# Altium PCB CW308T_SPC56.PcbDoc (part 1 of 2)
Units mil, origin at the board's own origin, x right, y up, seen from the top; angles counter-clockwise.
Board outline 2060 x 3180 mil, 2 copper layers (Component Side, Solder Side), stack 62.8 mil thick; 83 components, 64 nets, 689 pads, 120 vias.
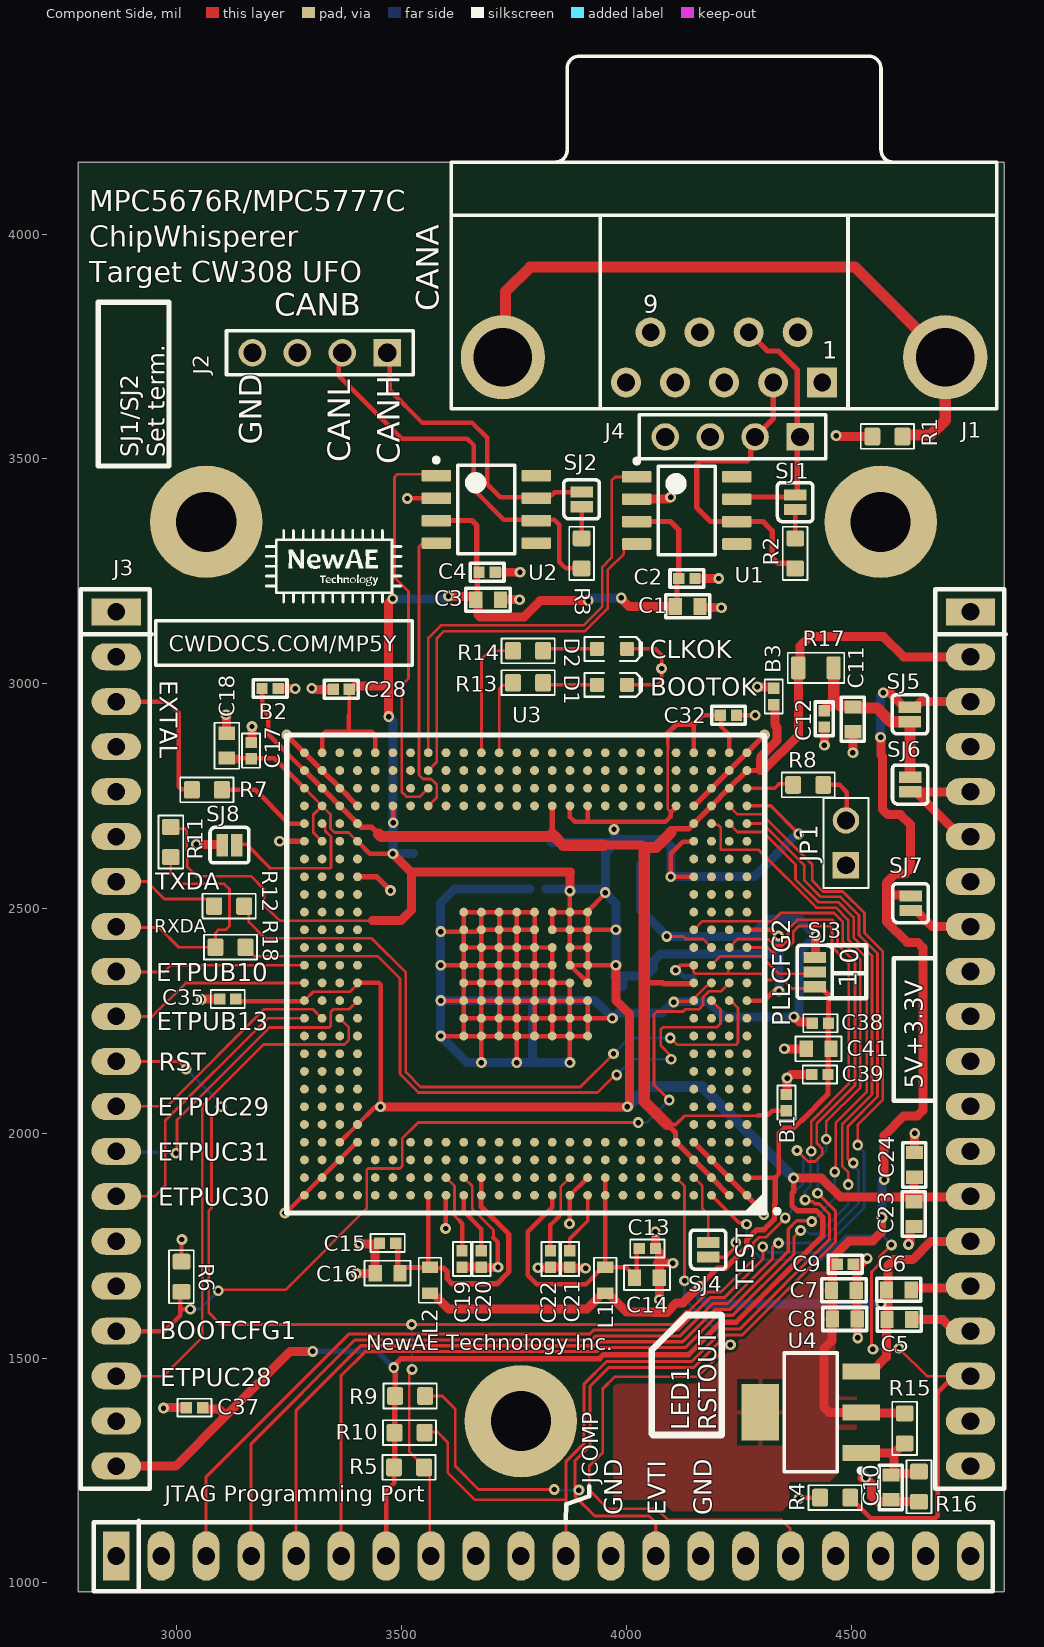
[diagram p0: Component Side view]
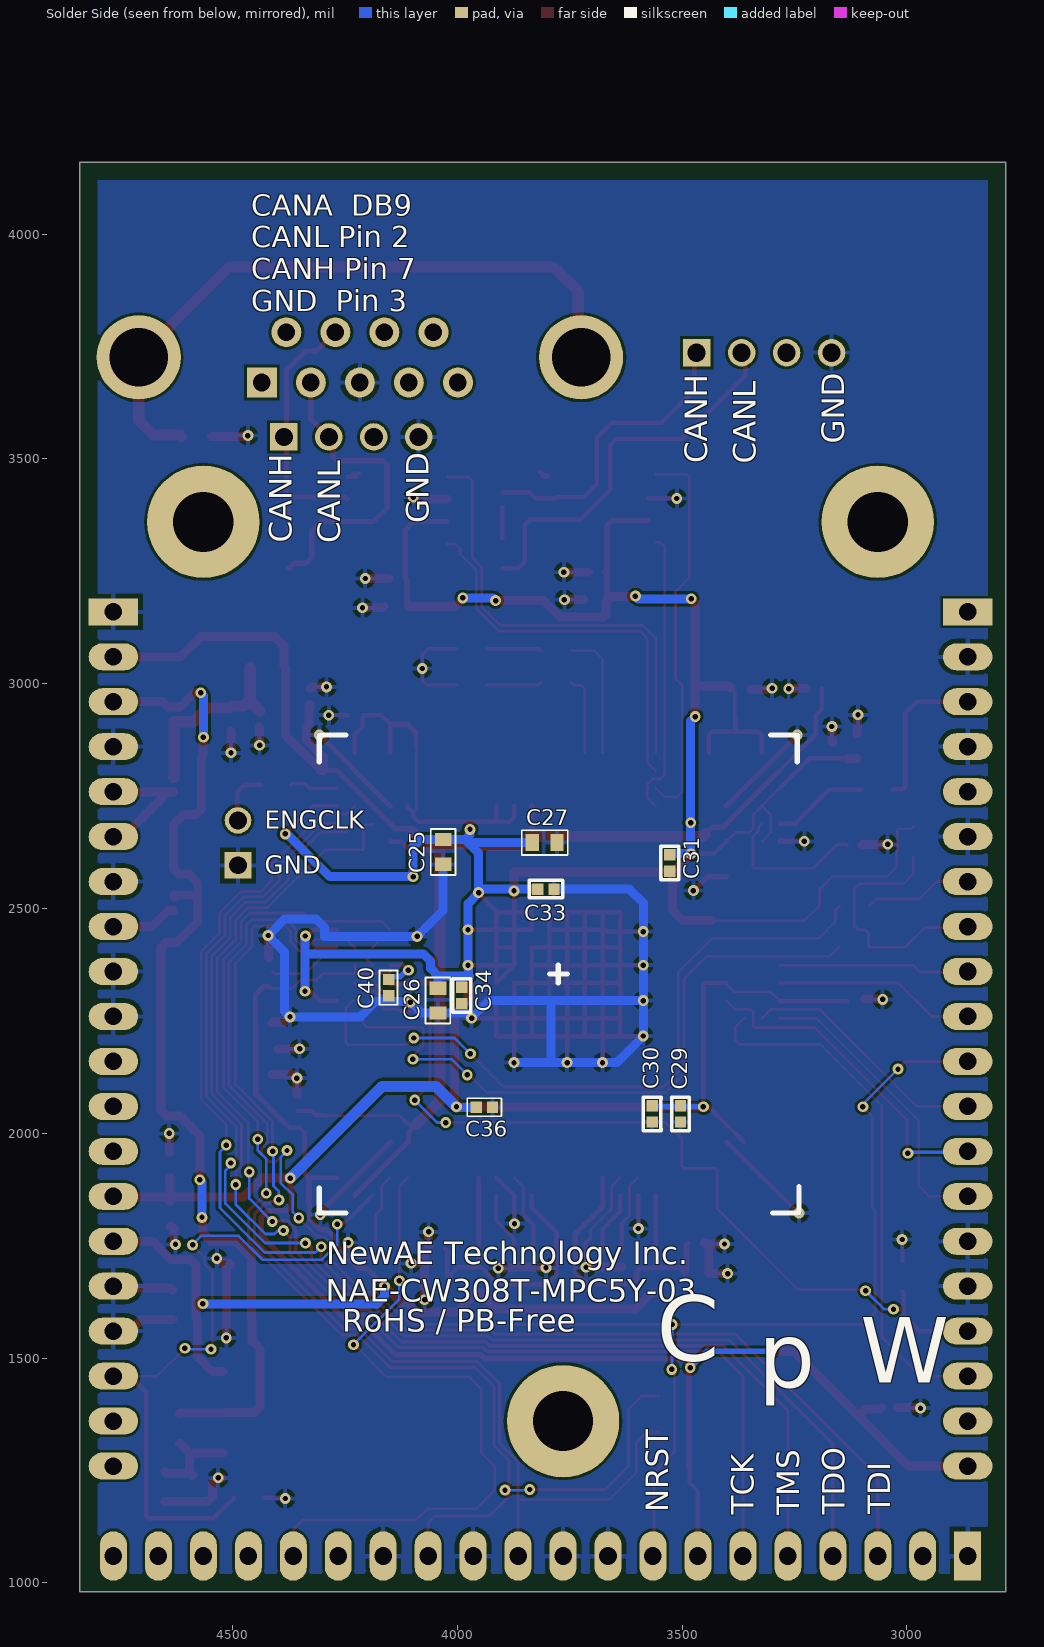
[diagram p1: Solder Side view, seen from below]

## Layer stack, top to bottom
Top Solder: solder mask 0.4, Solder Resist, Dk 3.5
Component Side: signal copper 1.4
Dielectric 3: prepreg 60, Dk 4.2
Solder Side: signal copper 1.4
Bottom Solder: solder mask 0.4, Solder Resist, Dk 3.5

## Board outline
2780,980 4840,980 4840,4160 2780,4160

## Design rules (kind name [scope] priority, off if disabled: settings)
BoardOutlineClearance [All] p1: gap=10 ignorepadtopadclearanceinfootprint=FALSE except(0: Arc-SplitContinuation Track-SplitContinuation SMDPad-SplitContinuation THPad-SplitContinuation Via-SplitContinuation Fill-SplitContinuation Poly-SplitContinuation Region-SplitContinuation Text-SplitContinuation; 40: Poly-OutlineEdge Poly-CavityEdge Poly-CutoutEdge Poly-SplitBarrior)
Clearance [All] p1: gap=6 ignorepadtopadclearanceinfootprint=FALSE except(0: Arc-Hole Track-Hole SMDPad-Hole THPad-Hole Via-Hole Fill-Hole Poly-Hole Region-Hole Text-Hole)
PlaneConnect PlaneConnect_Via [isVia] p1: planeconnectstyle=Direct reliefexpansion=20 reliefentries=4 reliefconductorwidth=10 reliefairgap=10
PlaneConnect [All] p2: planeconnectstyle=Relief reliefexpansion=20 reliefentries=4 reliefconductorwidth=10 reliefairgap=10
PolygonConnect [All] p1: connectstyle=Relief reliefconductorwidth=10 reliefentries=4 polygonreliefangle="90 Angle" airgapwidth=10
RoutingVias [All] p1: holewidth=12 width=24 viastyle="Through Hole" minholewidth=12 minwidth=20 maxholewidth=28 maxwidth=50
SilkToSilkClearance [All] p1: silktosilkclearance=1
SilkToSolderMaskClearance [IsPad] p1: minsilkscreentomaskgap=2 clearancetoexposedcopper=TRUE
SolderMaskExpansion [All] p1: expansion=4
Width [All] p1: maxlimit=50 minlimit=6 preferedwidth=8 minimp=50.000000 maximp=50.000000 favimp=50.000000
27 further rules are at their usual default settings.

## Classes and differential pairs
component class mpc56_clk: JP1 R4 R5 R6 R7 R8 R9 R10 SJ3 SJ4
component class mpc56_can: C1 C2 C3 C4 J1 J2 J4 R1 R2 R3 SJ1 SJ2 U1 U2
component class mpc56_cwconn: C5 C6 C7 C8 C9 C10 C11 C12 J3 R11 R12 R15 R16 R17 R18 SJ5 SJ6 SJ7 U4
component class mpc56_mcupower: B1 B2 B3 C13 C14 C15 C16 C17 C18 C19 C20 C21 C22 C23 C24 C25 C26 C27 C28 C29 C30 C31 C32 C33 C34 C35 C36 C37 C38 C39 C40 C41 L1 L2 SJ8
component class mpc56_cpuio2: D1 D2 R13 R14 U3

## Components (designator, comment, footprint, x,y, rotation, side; value= is the part's Value field where it differs from the comment)
B1 "DNM" CAPC0402_M#1 4355.5,2068.35 r90 top
B2 "DNM" CAPC0402_M#2 3207.35,2989.5 r0 top
B3 "DNM" CAPC0402_M#1 4327.3,2971.54 r90 top
C1 "2u2" CAPC0603_M 4136,3172 r0 top
C2 "100n" CAPC0402_M#2 4134,3234 r0 top
C3 "2u2" CAPC0603_M 3692,3187 r0 top
C4 "100n" CAPC0402_M#2 3690,3248 r0 top
C5 "2u2" CAPC0603_M 4606.59,1585.85 r0 top
C6 "2u2" CAPC0603_M 4605.59,1651.85 r0 top
C7 "2u2" CAPC0603_M 4483.41,1650.78 r0 top
C8 "2u2" CAPC0603_M 4485.41,1587.15 r0 top
C9 "100n" CAPC0402_M#2 4486.41,1709.15 r0 top
C10 "2u2" CAPC0603_M 4587.85,1212.41 r270 top
C11 "2u2" CAPC0603_M 4503.5,2920.94 r270 top
C12 "100n" CAPC0402_M#2 4439.57,2922.01 r270 top
C13 "100n" CAPC0402_M#1 4046.23,1743.92 r0 top
C14 "2u2" CAPC0603_M 4045.23,1678.99 r0 top
C15 "100n" CAPC0402_M#1 3468.5,1755.89 r180 top
C16 "2u2" CAPC0603_M 3468.5,1688.96 r180 top
C17 "100n" CAPC0402_M#1 3164.97,2851.39 r90 top
C18 "2u2" CAPC0603_M 3110.85,2862.2 r90 top
C19 "100n" CAPC0402_M#1 3633.86,1720.47 r270 top
C20 "100n" CAPC0402_M#1 3677.17,1720.47 r270 top
C21 "100n" CAPC0402_M#1 3874.02,1720.47 r270 top
C22 "100n" CAPC0402_M#1 3830.71,1720.47 r270 top
C23 "2u2" CAPC0603_M 4639.05,1820.64 r270 top
C24 "2u2" CAPC0603_M 4640.15,1929.85 r90 top
C25 "2u2" CAPC0603_M 4031.5,2625.98 r270 bottom
C26 "2u2" CAPC0603_M 4043.31,2295.28 r270 bottom
C27 "2u2" CAPC0603_M 3805.83,2646.66 r180 bottom
C28 "100n" CAPC0402_M#2 3365.4,2987.62 r180 top
C29 "100n" CAPC0402_M#2 3503.93,2043.3 r270 bottom
C30 "100n" CAPC0402_M#2 3566.92,2043.31 r270 bottom
C31 "100n" CAPC0402_M#2 3527.55,2601.38 r270 bottom
C32 "100n" CAPC0402_M#2 4226.53,2929.94 r0 top
C33 "100n" CAPC0402_M#2 3803.14,2543.31 r180 bottom
C34 "100n" CAPC0402_M#2 3990.31,2306.9 r270 bottom
C35 "100n" CAPC0402_M#1 3113,2299 r180 top
C36 "100n" CAPC0402_M#1 3940,2058 r180 bottom
C37 "100n" CAPC0402_M#1 3039,1390 r180 top
C38 "100n" CAPC0402_M#1 4431,2245 r180 top
C39 "100n" CAPC0402_M#1 4430,2131 r180 top
C40 "100n" CAPC0402_M#1 4153,2324 r270 bottom
C41 "2u2" CAPC0603_M 4427,2188 r180 top
D1 "LED, 0603, Green" LED-0603-GREEN 3967.62,2997.57 r0 top
D2 "LED, 0603, Red" LED-0603-RED 3967.62,3077.42 r0 top
J1 "DRB-09P11G1R" TAIT-DRB-09P11G1R_V 4380.47,3781.81 r0 top
J2 "HMTSW-104-23-L-S-237" SMTC-HMTSW-104-23-X-S-237 3467.72,3736.22 r180 top
J3 "CW308_TARGETCON" CW308_TBOARD_CONN 2865,3160 r0 top locked
J4 "HMTSW-104-23-L-S-237" SMTC-HMTSW-104-23-X-S-237 4386,3549 r180 top
JP1 "Jumper" 2x2.54mm_Header 4488,2596 r90 top
L1 "1k @ 1Mhz" IND_0603 3952.74,1673.24 r270 top
L2 "1k @ 1Mhz" IND_0603 3562.98,1673.24 r270 top
R1 "10R" RESC1608X55N 4580,3550 r0 top
R2 "120R" RESC1608X55N 4375,3290 r270 top
R3 "120R" RESC1608X55N 3900,3290 r270 top
R4 "10k" RESC1608X55N 4464,1190 r0 top
R5 "10k" RESC1608X55N 3516.27,1257 r0 top
R6 "10k" RESC1608X55N 3010.06,1681.17 r90 top
R7 "22R" RESC1608X55N 3066.65,2764.13 r180 top
R8 "22R" RESC1608X55N 4404,2775 r0 top
R9 "10k" RESC1608X55N 3518.7,1415.88 r180 top
R10 "10k" RESC1608X55N 3517.3,1334.4 r0 top
R11 "10k" RESC1608X55N 2986.35,2647.92 r90 top
R12 "10k" RESC1608X55N 3116.08,2505.41 r180 top
R13 "1k" RESC1608X55N 3781.04,3002.32 r0 top
R14 "1k" RESC1608X55N 3781.04,3073.26 r0 top
R15 "470R" RESC1608X55N 4618.59,1343.85 r270 top
R16 "22R" RESC1608X55N 4650.41,1214.15 r270 top
R17 "1R0" RESC2012X70N 4421.26,3035.43 r0 top
R18 "10k" RESC1608X55N 3119,2414 r180 top
SJ1 "NC" SJ_2S_NC 4375,3403.78 r90 top
SJ2 "NC" SJ_2S_NC 3900,3410 r90 top
SJ3 "NC" SJ_3S_NC12 4418.5,2358.68 r270 top
SJ4 "NC" SJ_2S_NC 4181.46,1741.1 r90 top
SJ5 "NC" SJ_2S_NC 4630.31,2931.77 r90 top
SJ6 "NO" SJ_2S_NO 4630.85,2775.75 r90 top
SJ7 "NO" SJ_2S_NO 4631.63,2511.75 r90 top
SJ8 "NC" SJ_2S_NC 3116.86,2641.12 r0 top
U1 "CAN8SOIC_BASIC" SOIC8_NARROW 4133.86,3385.83 r0 top
U2 "CAN8SOIC_BASIC" SOIC8_NARROW 3688,3388 r0 top
U3 "SPC5676RDK2MVU1R" TEPBGA416_27x27 3775.59,2354.33 r180 top locked
U4 "LD1117STR" SOT-223_L 4409.6,1379.64 r180 top

## Footprints (in the part's own frame and the unit in brackets; to place one, negate y for a bottom-side part, rotate by r counter-clockwise, add the part's x,y. Pads: shape width x height; smd on the part's side, far side on the other; paste and mask are expansions set on the pad)
2x2.54mm_Header [mm]
  rect 1.5x1.5 hole 1: 1(0,0)
  round 1.5 hole 1: 2(2.54,0)
  silkscreen extent -1.27,-1.27 3.81,1.27, body extent -1.27,-1.27 3.81,1.27, height 9.5
CAPC0402_M#1 [mm] "Chip Capacitor, 2-Leads, Body 0402, IPC Medium Density"
  rect 0.64x0.64 smd mask+0.06: 1(-0.46,0) 2(0.46,0)
  silkscreen extent -0.97,-0.51 0.97,0.51, body extent -0.55,-0.3 0.55,0.3, height 0.6
CAPC0402_M#2 [mm] "Chip Capacitor, 2-Leads, Body 0402, IPC Medium Density"
  rect 0.64x0.64 smd: 1(-0.46,0) 2(0.46,0)
  silkscreen extent -0.95,-0.5 0.95,0.5, body extent -0.55,-0.3 0.55,0.3, height 0.6
CAPC0603_M [mm]
  rect 0.75x0.95 smd: 1(-0.7,0) 2(0.7,0)
  silkscreen extent -1.25,-0.65 1.25,0.65, body extent -0.85,-0.45 0.85,0.45, height 0.9
CW308_TBOARD_CONN [mil]
  rect 110x60 hole 39: A1(0,0) C1(1900,0)
  oval 110x60 hole 39: A2(0,-100) A3(0,-200) A4(0,-300) A5(0,-400) A6(0,-500) A7(0,-600) A8(0,-700) A9(0,-800) A10(0,-900) A11(0,-1000) A12(0,-1100) A13(0,-1200) A14(0,-1300) A15(0,-1400) A16(0,-1500) A17(0,-1600) A18(0,-1700) A19(0,-1800) A20(0,-1900) C2(1900,-100) C3(1900,-200) C4(1900,-300) C5(1900,-400) C6(1900,-500) C7(1900,-600) C8(1900,-700) C9(1900,-800) C10(1900,-900) C11(1900,-1000) C12(1900,-1100) C13(1900,-1200) C14(1900,-1300) C15(1900,-1400) C16(1900,-1500) C17(1900,-1600) C18(1900,-1700) C19(1900,-1800) C20(1900,-1900)
  rect 60x110 hole 39: B1(0,-2100)
  oval 60x110 hole 39: B2(100,-2100) B3(200,-2100) B4(300,-2100) B5(400,-2100) B6(500,-2100) B7(600,-2100) B8(700,-2100) B9(800,-2100) B10(900,-2100) B11(1000,-2100) B12(1100,-2100) B13(1200,-2100) B14(1300,-2100) B15(1400,-2100) B16(1500,-2100) B17(1600,-2100) B18(1700,-2100) B19(1800,-2100) B20(1900,-2100)
  round 250 hole 134: MH1(200,200) MH2(900,-1800) MH2(1700,200)
  silkscreen extent -79,-2179 1979,50, body extent -50,-2149 1950,50, height 48
IND_0603 [mm] "Chip Inductor, 2-Leads, Body 1.60x0.80mm, IPC Medium Density"
  rect 0.64x0.92 smd: 1(-0.73,0) 2(0.73,0)
  Component Side pour cut-out: -0.686,0.457 0.838,0.457 0.838,-0.457 -0.686,-0.457
  silkscreen extent -1.27,-0.64 1.27,0.64, body extent -0.82,-0.43 0.82,0.43, height 0.9
LED-0603-GREEN [mm]
  round 0.254 on Mech15: 0(0,0)
  rrect25% 0.8x0.8 smd: A(-0.85,0) K(0.85,0)
  Component Side pour cut-out: -0.5,0.5 0.5,0.5 0.5,-0.5 -0.5,-0.5
  silkscreen extent -1.55,-0.67 1.68,0.67, body extent -0.8,-0.4 0.8,0.4, height 0.75
LED-0603-RED [mm]
  round 0.254 on Mech15: 0(0,0)
  rrect25% 0.8x0.8 smd: A(-0.85,0) K(0.85,0)
  Component Side pour cut-out: -0.5,0.5 0.5,0.5 0.5,-0.5 -0.5,-0.5
  silkscreen extent -1.55,-0.67 1.68,0.67, body extent -0.8,-0.4 0.8,0.4, height 0.75
RESC1608X55N [mm] "Chip Resistor, Body 1.6x0.8mm, EIA 0603, IPC Medium Density"
  round 0.254 on Mech15: 0(0,0)
  rrect25% 0.9x1 smd: 1(-0.85,0) 2(0.85,0)
  Component Side pour cut-out: -0.6,0.5 -0.4,0.7 0.4,0.7 0.6,0.5 0.6,-0.5 0.4,-0.7 -0.4,-0.7 -0.6,-0.5
  silkscreen extent -1.5,-0.7 1.5,0.7, body extent -0.87,-0.47 0.88,0.48, height 0.54
RESC2012X70N [mm] "Chip Resistor, Body 2.0x1.2mm, EIA 0805, IPC Medium Density"
  round 0.254 on Mech15: 0(0,0)
  rrect25% 0.8x1.3 smd: 1(-1,0) 2(1,0)
  Component Side pour cut-out: -0.725,0.65 -0.525,0.85 0.525,0.85 0.725,0.65 0.725,-0.65 0.525,-0.85 -0.525,-0.85 -0.725,-0.65
  silkscreen extent -1.6,-0.85 1.6,0.85, body extent -1.1,-0.67 1.1,0.68, height 0.69
SJ_2S_NC [mil] "Solder Jumper, closed with solder paste"
  rect 25x50 smd: 1(-16.22,0) 2(16.22,0)
  silkscreen extent -43,-39 43,39
SJ_2S_NO [mil] "Solder Jumper, open (no paste)"
  rect 25x50 smd paste-393.7: 1(-16.22,0) 2(16.22,0)
  silkscreen extent -43,-39 43,39
SJ_3S_NC12 [mil] "3-Way Solder Jumper, pads 1-2 closed"
  rect 25x50 smd: 1(-32.43,0) 2(0,0)
  rect 25x50 smd paste-393.7: 3(32.44,0)
  silkscreen extent -60,-39 59,39
SMTC-HMTSW-104-23-X-S-237 [mm] "Terminal Strip, 1x2 Pins, Vertical, 2.54mm Pitch, Male"
  rect 1.55x1.55 hole 1.02: 1(0,0)
  round 1.55 hole 1.02: 2(2.54,0) 3(5.08,0) 4(7.62,0)
  silkscreen extent -1.46,-1.24 9.08,1.24, body extent -1.27,-1.27 8.89,1.27, height 8.56
SOIC8_NARROW [mm] "SOIC, 8-Leads, Body 5x4mm, Pitch 1.27mm, IPC Low Density"
  rrect15% 1.65x0.65 smd: 1(-2.825,1.905) 2(-2.825,0.635) 3(-2.825,-0.635) 4(-2.825,-1.905) 5(2.825,-1.905) 6(2.825,-0.635) 7(2.825,0.635) 8(2.825,1.905)
  silkscreen extent -2.95,-2.5 1.6,2.9, body extent -3,-2.45 3,2.45, height 1.63
SOT-223_L [mm] "SOT223, 4-Leads, Body 6.5x3.5mm, Pitch 2.3mm, Lead Span 7mm, IPC High Density"
  rect 2.1x0.9 smd: 1(-2.85,2.3) 2(-2.85,0) 3(-2.85,-2.3)
  rect 2.1x3.2 smd: 4(2.85,0)
  silkscreen extent -2.98,-3.35 1.5,3.42, body extent -1.85,-3.35 1.85,3.35, height 1.8
TAIT-DRB-09P11G1R_V [mm] "Connector, D-Sub R/A  Male Connector, 2.77 mm Pitch"
  rect 1.69x1.69 hole 0.991: 1(1.385,-2.84)
  round 1.69 hole 0.991: 2(-1.385,-2.84) 3(-4.155,-2.84) 4(-6.925,-2.84) 5(-9.695,-2.84) 6(0,0) 7(-2.77,0) 8(-5.54,0) 9(-8.31,0)
  round 4.76 hole 3.3: 10(-16.65,-1.42) 11(8.34,-1.42)
  silkscreen extent -19.56,-4.32 11.24,15.6, body extent -19.85,-4.33 11.47,16.38, height 12.66
TEPBGA416_27x27 [mm] "BGA, 416-Leads, Body 27.00x27.00mmx2.55mm, Pitch 1.00mm"
  round 0.5 smd paste-0.038: A1(-12.5,12.5) A2(-11.5,12.5) A3(-10.5,12.5) A4(-9.5,12.5) A5(-8.5,12.5) A6(-7.5,12.5) A7(-6.5,12.5) A8(-5.5,12.5) A9(-4.5,12.5) A10(-3.5,12.5) A11(-2.5,12.5) A12(-1.5,12.5) A13(-0.5,12.5) A14(0.5,12.5) A15(1.5,12.5) A16(2.5,12.5) A17(3.5,12.5) A18(4.5,12.5) A19(5.5,12.5) A20(6.5,12.5) A21(7.5,12.5) A22(8.5,12.5) A23(9.5,12.5) A24(10.5,12.5) A25(11.5,12.5) A26(12.5,12.5) AA1(-12.5,-7.5) AA2(-11.5,-7.5) AA3(-10.5,-7.5) AA4(-9.5,-7.5) AA23(9.5,-7.5) AA24(10.5,-7.5) AA25(11.5,-7.5) AA26(12.5,-7.5) AB1(-12.5,-8.5) AB2(-11.5,-8.5) AB3(-10.5,-8.5) AB4(-9.5,-8.5) AB23(9.5,-8.5) AB24(10.5,-8.5) AB25(11.5,-8.5) AB26(12.5,-8.5) AC1(-12.5,-9.5) AC2(-11.5,-9.5) AC3(-10.5,-9.5) AC4(-9.5,-9.5) AC5(-8.5,-9.5) AC6(-7.5,-9.5) AC7(-6.5,-9.5) AC8(-5.5,-9.5) AC9(-4.5,-9.5) AC10(-3.5,-9.5) AC11(-2.5,-9.5) AC12(-1.5,-9.5) AC13(-0.5,-9.5) AC14(0.5,-9.5) AC15(1.5,-9.5) AC16(2.5,-9.5) AC17(3.5,-9.5) AC18(4.5,-9.5) AC19(5.5,-9.5) AC20(6.5,-9.5) AC21(7.5,-9.5) AC22(8.5,-9.5) AC23(9.5,-9.5) AC24(10.5,-9.5) AC25(11.5,-9.5) AC26(12.5,-9.5) AD1(-12.5,-10.5) AD2(-11.5,-10.5) AD3(-10.5,-10.5) AD4(-9.5,-10.5) AD5(-8.5,-10.5) AD6(-7.5,-10.5) AD7(-6.5,-10.5) AD8(-5.5,-10.5) AD9(-4.5,-10.5) AD10(-3.5,-10.5) AD11(-2.5,-10.5) AD12(-1.5,-10.5) AD13(-0.5,-10.5) AD14(0.5,-10.5) AD15(1.5,-10.5) AD16(2.5,-10.5) AD17(3.5,-10.5) AD18(4.5,-10.5) AD19(5.5,-10.5) AD20(6.5,-10.5) AD21(7.5,-10.5) AD22(8.5,-10.5) AD23(9.5,-10.5) AD24(10.5,-10.5) AD25(11.5,-10.5) AD26(12.5,-10.5) AE1(-12.5,-11.5) AE2(-11.5,-11.5) AE3(-10.5,-11.5) AE4(-9.5,-11.5) AE5(-8.5,-11.5) AE6(-7.5,-11.5) AE7(-6.5,-11.5) AE8(-5.5,-11.5) AE9(-4.5,-11.5) AE10(-3.5,-11.5) AE11(-2.5,-11.5) AE12(-1.5,-11.5) AE13(-0.5,-11.5) AE14(0.5,-11.5) AE15(1.5,-11.5) AE16(2.5,-11.5) AE17(3.5,-11.5) AE18(4.5,-11.5) AE19(5.5,-11.5) AE20(6.5,-11.5) AE21(7.5,-11.5) AE22(8.5,-11.5) AE23(9.5,-11.5) AE24(10.5,-11.5) AE25(11.5,-11.5) AE26(12.5,-11.5) AF1(-12.5,-12.5) AF2(-11.5,-12.5) AF3(-10.5,-12.5) AF4(-9.5,-12.5) AF5(-8.5,-12.5) AF6(-7.5,-12.5) AF7(-6.5,-12.5) AF8(-5.5,-12.5) AF9(-4.5,-12.5) AF10(-3.5,-12.5) AF11(-2.5,-12.5) AF12(-1.5,-12.5) AF13(-0.5,-12.5) AF14(0.5,-12.5) AF15(1.5,-12.5) AF16(2.5,-12.5) AF17(3.5,-12.5) AF18(4.5,-12.5) AF19(5.5,-12.5) AF20(6.5,-12.5) AF21(7.5,-12.5) AF22(8.5,-12.5) AF23(9.5,-12.5) AF24(10.5,-12.5) AF25(11.5,-12.5) AF26(12.5,-12.5) B1(-12.5,11.5) B2(-11.5,11.5) B3(-10.5,11.5) B4(-9.5,11.5) B5(-8.5,11.5) B6(-7.5,11.5) B7(-6.5,11.5) B8(-5.5,11.5) B9(-4.5,11.5) B10(-3.5,11.5) B11(-2.5,11.5) B12(-1.5,11.5) B13(-0.5,11.5) B14(0.5,11.5) B15(1.5,11.5) B16(2.5,11.5) B17(3.5,11.5) B18(4.5,11.5) B19(5.5,11.5) B20(6.5,11.5) B21(7.5,11.5) B22(8.5,11.5) B23(9.5,11.5) B24(10.5,11.5) B25(11.5,11.5) B26(12.5,11.5) C1(-12.5,10.5) C2(-11.5,10.5) C3(-10.5,10.5) C4(-9.5,10.5) C5(-8.5,10.5) C6(-7.5,10.5) C7(-6.5,10.5) C8(-5.5,10.5) C9(-4.5,10.5) C10(-3.5,10.5) C11(-2.5,10.5) C12(-1.5,10.5) C13(-0.5,10.5) C14(0.5,10.5) C15(1.5,10.5) C16(2.5,10.5) C17(3.5,10.5) C18(4.5,10.5) C19(5.5,10.5) C20(6.5,10.5) C21(7.5,10.5) C22(8.5,10.5) C23(9.5,10.5) C24(10.5,10.5) C25(11.5,10.5) C26(12.5,10.5) D1(-12.5,9.5) D2(-11.5,9.5) D3(-10.5,9.5) D4(-9.5,9.5) D5(-8.5,9.5) D6(-7.5,9.5) D7(-6.5,9.5) D8(-5.5,9.5) D9(-4.5,9.5) D10(-3.5,9.5) D11(-2.5,9.5) D12(-1.5,9.5) D13(-0.5,9.5) D14(0.5,9.5) D15(1.5,9.5) D16(2.5,9.5) D17(3.5,9.5) D18(4.5,9.5) D19(5.5,9.5) D20(6.5,9.5) D21(7.5,9.5) D22(8.5,9.5) D23(9.5,9.5) D24(10.5,9.5) D25(11.5,9.5) D26(12.5,9.5) E1(-12.5,8.5) E2(-11.5,8.5) E3(-10.5,8.5) E4(-9.5,8.5) E23(9.5,8.5) E24(10.5,8.5) E25(11.5,8.5) E26(12.5,8.5) F1(-12.5,7.5) F2(-11.5,7.5) F3(-10.5,7.5) F4(-9.5,7.5) F23(9.5,7.5) F24(10.5,7.5) F25(11.5,7.5) F26(12.5,7.5) G1(-12.5,6.5) G2(-11.5,6.5) G3(-10.5,6.5) G4(-9.5,6.5) G23(9.5,6.5) G24(10.5,6.5) G25(11.5,6.5) G26(12.5,6.5) H1(-12.5,5.5) H2(-11.5,5.5) H3(-10.5,5.5) H4(-9.5,5.5) H23(9.5,5.5) H24(10.5,5.5) H25(11.5,5.5) H26(12.5,5.5) J1(-12.5,4.5) J2(-11.5,4.5) J3(-10.5,4.5) J4(-9.5,4.5) J23(9.5,4.5) J24(10.5,4.5) J25(11.5,4.5) J26(12.5,4.5) K1(-12.5,3.5) K2(-11.5,3.5) K3(-10.5,3.5) K4(-9.5,3.5) K10(-3.5,3.5) K11(-2.5,3.5) K12(-1.5,3.5) K13(-0.5,3.5) K14(0.5,3.5) K15(1.5,3.5) K16(2.5,3.5) K17(3.5,3.5) K23(9.5,3.5) K24(10.5,3.5) K25(11.5,3.5) K26(12.5,3.5) L1(-12.5,2.5) L2(-11.5,2.5) L3(-10.5,2.5) L4(-9.5,2.5) L10(-3.5,2.5) L11(-2.5,2.5) L12(-1.5,2.5) L13(-0.5,2.5) L14(0.5,2.5) L15(1.5,2.5) L16(2.5,2.5) L17(3.5,2.5) L23(9.5,2.5) L24(10.5,2.5) L25(11.5,2.5) L26(12.5,2.5) M1(-12.5,1.5) M2(-11.5,1.5) M3(-10.5,1.5) M4(-9.5,1.5) M10(-3.5,1.5) M11(-2.5,1.5) M12(-1.5,1.5) M13(-0.5,1.5) M14(0.5,1.5) M15(1.5,1.5) M16(2.5,1.5) M17(3.5,1.5) M23(9.5,1.5) M24(10.5,1.5) M25(11.5,1.5) M26(12.5,1.5) N1(-12.5,0.5) N2(-11.5,0.5) N3(-10.5,0.5) N4(-9.5,0.5) N10(-3.5,0.5) N11(-2.5,0.5) N12(-1.5,0.5) N13(-0.5,0.5) N14(0.5,0.5) N15(1.5,0.5) N16(2.5,0.5) N17(3.5,0.5) N23(9.5,0.5) N24(10.5,0.5) N25(11.5,0.5) N26(12.5,0.5) P1(-12.5,-0.5) P2(-11.5,-0.5) P3(-10.5,-0.5) P4(-9.5,-0.5) P10(-3.5,-0.5) P11(-2.5,-0.5) P12(-1.5,-0.5) P13(-0.5,-0.5) P14(0.5,-0.5) P15(1.5,-0.5) P16(2.5,-0.5) P17(3.5,-0.5) P23(9.5,-0.5) P24(10.5,-0.5) P25(11.5,-0.5) P26(12.5,-0.5) R1(-12.5,-1.5) R2(-11.5,-1.5) R3(-10.5,-1.5) R4(-9.5,-1.5) R10(-3.5,-1.5) R11(-2.5,-1.5) R12(-1.5,-1.5) R13(-0.5,-1.5) R14(0.5,-1.5) R15(1.5,-1.5) R16(2.5,-1.5) R17(3.5,-1.5) R23(9.5,-1.5) R24(10.5,-1.5) R25(11.5,-1.5) R26(12.5,-1.5) T1(-12.5,-2.5) T2(-11.5,-2.5) T3(-10.5,-2.5) T4(-9.5,-2.5) T10(-3.5,-2.5) T11(-2.5,-2.5) T12(-1.5,-2.5) T13(-0.5,-2.5) T14(0.5,-2.5) T15(1.5,-2.5) T16(2.5,-2.5) T17(3.5,-2.5) T23(9.5,-2.5) T24(10.5,-2.5) T25(11.5,-2.5) T26(12.5,-2.5) U1(-12.5,-3.5) U2(-11.5,-3.5) U3(-10.5,-3.5) U4(-9.5,-3.5) U10(-3.5,-3.5) U11(-2.5,-3.5) U12(-1.5,-3.5) U13(-0.5,-3.5) U14(0.5,-3.5) U15(1.5,-3.5) U16(2.5,-3.5) U17(3.5,-3.5) U23(9.5,-3.5) U24(10.5,-3.5) U25(11.5,-3.5) U26(12.5,-3.5) V1(-12.5,-4.5) V2(-11.5,-4.5) V3(-10.5,-4.5) V4(-9.5,-4.5) V23(9.5,-4.5) V24(10.5,-4.5) V25(11.5,-4.5) V26(12.5,-4.5) W1(-12.5,-5.5) W2(-11.5,-5.5) W3(-10.5,-5.5) W4(-9.5,-5.5) W23(9.5,-5.5) W24(10.5,-5.5) W25(11.5,-5.5) W26(12.5,-5.5) Y1(-12.5,-6.5) Y2(-11.5,-6.5) Y3(-10.5,-6.5) Y4(-9.5,-6.5) Y23(9.5,-6.5) Y24(10.5,-6.5) Y25(11.5,-6.5) Y26(12.5,-6.5)
  silkscreen extent -14.33,-13.5 13.5,13.52, body extent -13.5,-13.5 13.5,13.5, height 2.55

## Part data
B1 B2 B3: library part CCHIP-DNM-0402, "DNM, 0402", Case-EIA=0402, Component Group=Capacitor, Component Type=Standard, Mounting Technology=SMT, Part Number=CCHIP-DNM-0402, Pin Count=2
C1 C3 C5 C6 C7 C8 C10 C11 C14 C16 C18 C23 C24 C41: library part CCHIP-2u2-0603, "2u2, 0603", Case-EIA=0603, Case-Metric=1608, Component Type=Standard, Mounting Technology=SMT, Part Number=CCHIP-2u2-0603, Pin Count=2
C2 C4 C9 C12 C13 C15 C17 C19 C20 C21 C22 C28 C29 C30 C31 C32 C33 C34 C35 C36 C37 C38 C39 C40: library part CCHIP-100n-0402, "100n, 0402", Case-EIA=0402, Component Type=Standard, Mounting Technology=SMT, Part Number=CCHIP-100n-0402, Pin Count=2
C25 C26 C27: library part CCHIP-2u2-0603, "2u2, 0603", Case-EIA=0603, Case-Metric=1608, Manufacture 1=Samsung, Manufacture Part Number 1=CL10B225KP8NNNC, Rated Voltage=10VDC, Supplier Part Number 1=1276-1134-2-ND, Component Group=Capacitor, Component Type=Standard, Mounting Technology=SMT, Part Number=CCHIP-2u2-0603, Pin Count=2, Supplier 1=Digi-Key
D1: library part LEDCHIP_0603_GREEN, "Chip LED, Green", Component Type=Standard, Mounting Technology=SMT, Part Number=LEDCHIP_0603_GREEN, Pin Count=2
D2: library part LEDCHIP_0603_RED, "Chip LED, Red", Component Type=Standard, Mounting Technology=SMT, Part Number=LEDCHIP_0603_RED, Pin Count=2
J1: library part CMP-0264-00001-1, "DB9 R/A Connector, Through-hole, Male", ComponentLink1Description="Manufacturer URL", ComponentLink1URL=http://www.taitek.com/, ComponentLink2Description=Datasheet, ComponentLink2URL=http://www.taitek.com/connects_prod_info.asp?id=A100011, Mounting Technology="Through Hole", PackageDescription="9-Pin D-Sub R/A  Male Connector, 2.77 mm Pitch", PackageReference=DRB-09P11G1R, PartNumber=DRB-09P11G1R
J2 J4: library part CMP-1024-00020-1, Manufacturer=Samtec, Temperature Range="-55 to 125 degC", ComponentLink1Description="Manufacturer URL", ComponentLink1URL=http://www.samtec.com, ComponentLink2Description=Datasheet, ComponentLink2URL=http://www.samtec.com/documents/webfiles/pdf/HMTSW.PDF, ComponentLink3Description="Package Specification", ComponentLink3URL=http://www.samtec.com/documents/webfiles/cpdf/HMTSW-XXX-XX-X-X-XXXX-XX-XX-MKT1.pdf, DatasheetVersion=F-214, Mounting Technology=Through-hole, Orientation=Vertical, PackageDescription="Assembly .025 [.64] SQ. Post Hi-Temp Terminal Strip", PackageReference=HMTSW-104-23-X-S-237, PackageVersion="AL, 3/1987", PartNumber=HMTSW-104-23-L-S-237, Pitch="2.54 mm", RoHS=True
J3: library part CW308_TBOARD, "CW308 \"Standard\" Target Board Connector"
JP1: library part 2_PIN_JUMPER, "1x2 2.54mm header, male pins", Manufacture 1=Harwin, Manufacture Part Number 1=M20-9990246, Supplier Part Number 1=952-2262-ND, Component Group="PCB Feature", Component Type=Standard, Mounting Technology=Through-hole, Part Number=2_PIN_JUMPER, Pin Count=2, PP Material Stack=0, PP Rotation=0, RoHS=Yes, Supplier 1=Digi-Key
L1 L2: library part FBCHIP-1k-0603, "Ferrite Beads HI CUR CHIP BD 0603 1000OHMS 25%", Manufacture 1="Taiyo Yuden", Manufacture Part Number 1="FBMH1608HM102-T / FBMH1608HM102-T / FBMH1608HM102-T / FBMH1608HM102-T", Supplier Part Number 1=963-FBMH1608HM102-T, Component Group=Inductor, Component Type=Standard, Mounting Technology=SMT, Part Number=FBCHIP-1k-0603, Pin Count=2, PP Material Stack=0, PP Rotation=0, RoHS=Yes, Supplier 1=Mouser
R1: library part RCHIP-10R-0603, "10R res, 0603, 1%, 1/10W", Case-EIA=0603, Case-Metric=1608, Manufacture 1=Yageo, Manufacture Part Number 1=RC0603FR-0710RL, Rated Power=0.1W, Rated Voltage=75VDC, Supplier Part Number 1=311-10.0HRCT-ND, Temperature Range="-55C to 155C", Tolerance=1%, Component Type=Standard, Mounting Technology=SMT, Part Number=RCHIP-10R-0603, Pin Count=2, Supplier 1=Digi-Key
R2 R3: library part RCHIP-120R-0603, "120R res, 0603, 1%, 1/10W", Case-EIA=0603, Case-Metric=1608, Manufacture 1=Yageo, Manufacture Part Number 1=RC0603FR-07120RL, Rated Power=0.1W, Rated Voltage=75VDC, Supplier Part Number 1=311-120HRCT-ND, Temperature Range="-55C to 155C", Tolerance=1%, Component Type=Standard, Mounting Technology=SMT, Part Number=RCHIP-120R-0603, Pin Count=2, Supplier 1=Digi-Key
R4 R5 R6 R9 R10 R11 R12 R18: library part RCHIP-10K-0603, "10k res, 0603, 1%, 1/10W", Case-EIA=0603, Case-Metric=1608, Manufacture 1=Yageo, Manufacture Part Number 1=RC0603FR-0710KL, Rated Power=0.1W, Rated Voltage=75VDC, Supplier Part Number 1=311-10.0KHRCT-ND, Temperature Range="-55C to 155C", Tolerance=1%, Component Type=Standard, Mounting Technology=SMT, Part Number=RCHIP-10K-0603, Pin Count=2, Supplier 1=Digi-Key
R7 R8: library part RCHIP-22R-0603, "22R res, 0603, 1%, 1/10W", Case-EIA=0603, Case-Metric=1608, Manufacture 1=Yageo, Manufacture Part Number 1=RC0603FR-0722RL, Rated Power=0.1W, Rated Voltage=75VDC, Supplier Part Number 1=311-22.0HRCT-ND, Temperature Range="-55C to 155C", Tolerance=1%, Component Type=Standard, Mounting Technology=SMT, Part Number=RCHIP-22R-0603, Pin Count=2, Supplier 1=Digi-Key
R13 R14: library part RCHIP-1K-0603, "1k res, 0603, 1%, 1/10W", Case-EIA=0603, Case-Metric=1608, Manufacture 1=Yageo, Manufacture Part Number 1=RC0603FR-071KL, Rated Power=0.1W, Rated Voltage=75VDC, Supplier Part Number 1=311-1.00KHRCT-ND, Temperature Range="-55C to 155C", Tolerance=1%, Component Type=Standard, Mounting Technology=SMT, Part Number=RCHIP-1K-0603, Pin Count=2, Supplier 1=Digi-Key
R15: library part RCHIP-120R-0603, "470R res, 0603, 1%, 1/10W", Case-EIA=0603, Case-Metric=1608, Manufacture 1=Yageo, Manufacture Part Number 1=RC0603FR-07470RL, Rated Power=0.1W, Rated Voltage=75VDC, Supplier Part Number 1=311-470HRCT-ND, Temperature Range="-55C to 155C", Tolerance=1%, Component Type=Standard, Mounting Technology=SMT, Part Number=RCHIP-120R-0603, Pin Count=2, Supplier 1=Digi-Key
R16: library part RCHIP-120R-0603, "120R res, 0603, 1%, 1/10W", Case-EIA=0603, Case-Metric=1608, Manufacture 1=Yageo, Manufacture Part Number 1=RC0603FR-0722RL, Rated Power=0.1W, Rated Voltage=75VDC, Supplier Part Number 1=311-22HRCT-ND, Temperature Range="-55C to 155C", Tolerance=1%, Component Type=Standard, Mounting Technology=SMT, Part Number=RCHIP-120R-0603, Pin Count=2, Supplier 1=Digi-Key
R17: library part RCHIP-1R0-0805, "1R0 res, 0805, 1%, 1/8W", Case-EIA=0805, Manufacture 1=Yageo, Manufacture Part Number 1=RC0805FR-071RL, Rated Power=0.125W, Rated Voltage=75VDC, Supplier Part Number 1=311-1.00CRCT-ND, Temperature Range="-55C to 155C", Tolerance=1%, Component Type=Standard, Mounting Technology=SMT, Part Number=RCHIP-1R0-0805, Pin Count=2, Supplier 1=Digi-Key
SJ1 SJ2 SJ4 SJ5 SJ8: library part SJ_2S, "Solder Jumper, NC", Component Type="Standard (No BOM)", Part Number=SJ_2S, Pin Count=2
SJ3: library part SJ_3S_12JMP, "Solder Jumper, NC", Component Group="PCB Feature", Component Type="Standard (No BOM)", Mounting Technology=COPPER, Part Number=SJ_3S_12JMP, Pin Count=3
SJ6 SJ7: library part SJ_2S_NO, "Solder Jumper, NO", Component Type="Standard (No BOM)", Mounting Technology=COPPER, Part Number=SJ_2S_NO, Pin Count=2
U1 U2: library part SN65HVD232DR, "CAN Transceiver, 3.3V", Manufacture 1="Texas Instruments", Supplier Part Number 1=296-26344-1-ND, Component Group="Digital IC", Component Type=Standard, Manufacture Part Number 1=SN65HVD232DR, Mounting Technology=SMT, Part Number=SN65HVD232DR, Pin Count=8, RoHS=Yes, Supplier 1=Digi-Key
U3: "Dual-Core PPC, Automotive", Manufacture 1=NXP, Component Group="Digital IC", Component Type=Standard, Manufacture Part Number 1=SPC5676RDK2MVU1R, Mounting Technology=SMT, Part Number=SPC5676RDK2MVU1R, Pin Count=412, PP Material Stack=0, PP Rotation=0, RoHS=Yes, Supplier 1=Mouser
U4: library part CMP-0244-00313-1, "Adjustable Low Drop Voltage Regulator, 1.25 to 15V, 4-Pin SOT-223, Tape and Reel", Supplier Part Number 1=497-1244-1-ND, ComponentLink1Description="Manufacturer URL", ComponentLink1URL=http://www.st.com, ComponentLink2Description=Datasheet, ComponentLink2URL=http://www.st.com/internet/com/TECHNICAL_RESOURCES/TECHNICAL_LITERATURE/DATASHEET/CD00000544.pdf, DatasheetVersion=1/11/2011, PackageDescription="4-Pin SOT-223 Package, 6.5 x 3.5 mm Body, 2.3 mm Pitch, 7 mm Lead Span", PackageReference=SOT-223, PackageVersion=2010, Supplier 1=Digi-Key

## Via types
v1: diameter 24, hole 12, Component Side to Solder Side, tented both sides, 120 vias

## Nets (pads, with @x,y where several pads share a name; then routed paths per layer and width w, separated by ;. In a path a pad name is that pad's centre, name@x,y a point inside that pad or via, vN(x,y) a via of type N, cw(c..) or ccw(c..) an arc to the next point about the centre after c; other vN are vias at no path point)
BOOTCFG1: J3.A17 R6.1 U3.N2 | length 1989.9
  Component Side w6: v1(3092,1650) 3094,1652 3241,1652 3422,1833 3422,1918.49 3425.51,1922 3496,1922 3500.84,1926.84 3500.84,1988.12 3536.72,2024 v1(4026,2024) ; v1(4095,2074) 4060.86,2108.14 4060.86,2264 4067.86,2271 4126.15,2271 4131.15,2276 4161,2276 4170.13,2285.13 4170.13,2303.13 4182.8,2315.8 4209.5,2315.8 U3.N2@4228.35,2334.65
  Component Side w10: J3.A17@2865,1560 2972,1560 3007,1595 3007,1609 ; R6.1@3010.06,1647.71 3007,1644.65 3007,1609 ; v1@3031,1610 v1(3030,1609) 3007,1609
  Solder Side w6: v1(3030,1609) 3051,1609 v1(3092,1650) ; v1(4026,2024) 4045,2024 v1(4095,2074)
CANARX: U1.4 U3.AE19 | length 890.7
  Component Side w6: U3.AE19@3559.06,2807.09 3577.9,2825.93 3577.9,3100.9 3594,3117 3907.97,3117 3958,3167.03 3958,3253 3994.03,3289.03 3994.03,3301.03 4003.83,3310.83 U1.4@4022.64,3310.83
CANATX: U1.1 U3.AF19 | length 1019.5
  Component Side w6: U3.AF19@3559.06,2846.46 3559.06,3102.06 3587,3130 3904,3130 3946,3172 3946,3260 3967,3281 3967,3452 3975,3460 4021.81,3460 U1.1@4022.64,3460.83
CANBRX: U2.4 U3.AC19 | length 635.5
  Component Side w6: U2.4@3558.78,3315 3548.32,3315 3538.53,3305.2 3538.53,2797.47 3547.75,2788.25 3565.18,2788.25 3577.9,2775.52 3577.9,2747.19 U3.AC19@3559.06,2728.35
CANBTX: U2.1 U3.AD19 | length 868.8
  Component Side w6: U2.1@3558.78,3465 3557.78,3466 3490,3466 3484,3460 3484,3236 3515,3205 3515,3012 3500,2997 3500,2759 3510.12,2748.88 3540.21,2748.88 U3.AD19@3559.06,2767.72
CLKIN: J3.A3 R7.2 | length 345.4
  Component Side w10: J3.A3@2865,2960 2979,2960 3004,2935 3004,2771 3010,2765 3032.32,2765 R7.2@3033.19,2764.13
CLKOUT: JP1.2 R8.2 | length 123
  Component Side w10: R8.2@4437.46,2775 4474,2775 4490,2759 4490,2698 JP1.2@4488,2696
CS: J3.A18 U3.L24 | length 1185.2
  Component Side w6: J3.A18@2865,1460 2970,1460 3056,1546 3056,2061 3192.69,2197.69 3372.69,2197.69 3382,2207 3382,2236.11 U3.L24@3362.21,2255.91
EVTI: J3.B13 R9.1 U3.T4 | length 2874.2
  Component Side w6: R9.1@3552.17,1415.88 3590.12,1415.88 3619,1387 3619,1260 3671,1208 v1(3839,1208) ; 3885,1193 3894,1202 v1(3894,1206.5) ; U3.T4@4149.61,2452.76 4168.85,2472 4325,2472 4343,2490 4460.97,2490 4481,2469.97 4481,2426.03 4520,2387.03 4520,2102 4444,2026 v1(4444,1987)
  Component Side w7: J3.B13@4065,1060 4065,1134 4050,1149 3929,1149 3885,1193 3885,1271.4 3918.66,1305.06 3918.66,1437.34 3960.82,1479.5 4150.09,1479.5 4222.09,1551.5 4257.5,1551.5 4464.5,1758.5 4464.5,1827.5 v1(4425,1867)
  Solder Side w6: v1(3839,1208) 3840.5,1206.5 v1(3894,1206.5) ; v1(4425,1867) 4425,1942.7 4444,1961.7 v1(4444,1987)